# EAGLE board Clock (EAGLE 9.7.0)

Size 154.69 x 107.26 mm. Coordinates in mm from the lower left corner, seen from the top.
Outline: 0,0 154.69,0 154.69,107.26 0,107.26 0,0
Copper layers (1*16): Top 0.035mm / dielectric 1.5mm / Bottom 0.035mm
Design rules "default": minimum track width 6mil, minimum drill 0.35mm, track to track 6mil, track to pad 6mil, pad to pad 6mil, via to via 6mil, smd to smd 6mil, copper to edge 40mil, drill to drill 6mil, minimum pad ring 10mil, minimum via ring 8mil, stop-mask expansion 4mil, vias tented up to drill 0mil, thermal gap 10mil

## Footprints (pad centres in the part's own frame; a part is rotated, then mirrored left to right if it is on the bottom)
7SEG-13 = drill 0.813 long: 1 -5.08,-7.62; 2 -2.54,-7.62; 3 0,-7.62; 4 2.54,-7.62; 5 5.08,-7.62; 6 5.08,7.62; 7 2.54,7.62; 8 0,7.62; 9 -2.54,7.62; 10 -5.08,7.62
SWITCH-MOMENTARY-PTH-6.5MM = drill 1.016 pad 1.88: 1 -3.251,2.261; 2 3.251,2.261; 3 -3.251,-2.261; 4 3.251,-2.261
ARDUINO-UNO-R3-SHIELD = drill 1.016 pad 1.88: 3.3V 24.13,-2.54; 5V 24.13,0; A0 24.13,12.7; A1 24.13,15.24; A2 24.13,17.78; A3 24.13,20.32; A4 24.13,22.86; A5 24.13,25.4; AREF -24.13,-13.97; D2 -24.13,20.32; D3 -24.13,17.78; D4 -24.13,15.24; D5 -24.13,12.7; D6 -24.13,10.16; D7 -24.13,7.62; D8 -24.13,3.81; D9 -24.13,1.27; D10 -24.13,-1.27; D11 -24.13,-3.81; D12 -24.13,-6.35; D13 -24.13,-8.89; GND@0 24.13,2.54; GND@1 24.13,5.08; GND@2 -24.13,-11.43; IOREF 24.13,-7.62; NC 24.13,-10.16; RES 24.13,-5.08; RX -24.13,25.4; SCL -24.13,-19.05; SDA -24.13,-16.51; TX -24.13,22.86; VIN 24.13,7.62
DIP762W53P254L1969H508Q16B = drill 0.743 pad 1.343: 1 -3.81,8.89; 2 -3.81,6.35; 3 -3.81,3.81; 4 -3.81,1.27; 5 -3.81,-1.27; 6 -3.81,-3.81; 7 -3.81,-6.35; 8 -3.81,-8.89; 9 3.81,-8.89; 10 3.81,-6.35; 11 3.81,-3.81; 12 3.81,-1.27; 13 3.81,1.27; 14 3.81,3.81; 15 3.81,6.35; 16 3.81,8.89

## Placement (x,y rotation side)
DIGIT_H1_2  7SEG-CA  [7SEG-13]  21.97,93.17 0 top
DIGIT_H2_2  7SEG-CA  [7SEG-13]  9.27,93.17 0 top
DIGITM11  7SEG-CA  [7SEG-13]  52.45,93.17 0 top
DIGITM21  7SEG-CA  [7SEG-13]  39.75,93.17 0 top
DIGITS11  7SEG-CA  [7SEG-13]  82.93,93.17 0 top
DIGITS21  7SEG-CA  [7SEG-13]  70.23,93.17 0 top
SHOURS_INC  SWITCH_MOMENTARY  [SWITCH-MOMENTARY-PTH-6.5MM]  123.57,91.9 90 top
SMINUTES_INC  SWITCH_MOMENTARY  [SWITCH-MOMENTARY-PTH-6.5MM]  131.19,91.9 90 top
SPAUSE/PLAY  SWITCH_MOMENTARY  [SWITCH-MOMENTARY-PTH-6.5MM]  146.43,91.9 90 top
SSECONDS_INC  SWITCH_MOMENTARY  [SWITCH-MOMENTARY-PTH-6.5MM]  138.81,91.9 90 top
U1  ARDUINO-UNO-R3-SHIELD  [ARDUINO-UNO-R3-SHIELD]  87.29,29.84 270 top
UIC7447_  CD4511_PDIP  [DIP762W53P254L1969H508Q16B]  104.52,91.9 90 top

## Library data of the parts
DIGIT_H1_2 DIGIT_H2_2 DIGITM11 DIGITM21 DIGITS11 DIGITS21 = Tinkercad; CATEGORY: Opto-Electronic; SUB-CATEGORY: Display; TYPE: 7-Segment
SHOURS_INC SMINUTES_INC SPAUSE/PLAY SSECONDS_INC U1 UIC7447_ = Tinkercad

## Nets
DIGIT_H2_2_C: DIGIT_H1_2.4 DIGIT_H2_2.4 DIGITM11.4 DIGITM21.4 DIGITS21.4
U1_5V: U1.5V UIC7447_.16
U1_D2: SMINUTES_INC.1 SMINUTES_INC.2 U1.D2
U1_D3: SHOURS_INC.1 SHOURS_INC.2 U1.D3
U1_D4: U1.D4 UIC7447_.7
U1_D5: U1.D5 UIC7447_.1
U1_D6: U1.D6 UIC7447_.2
U1_D7: U1.D7 UIC7447_.6
U1_GND: SHOURS_INC.3 SHOURS_INC.4 SMINUTES_INC.3 SMINUTES_INC.4 SPAUSE/PLAY.3 SPAUSE/PLAY.4 SSECONDS_INC.3 SSECONDS_INC.4 U1.GND@0 U1.GND@1 U1.GND@2 UIC7447_.8
U1_RX: SPAUSE/PLAY.1 SPAUSE/PLAY.2 U1.RX
U1_TX: SSECONDS_INC.1 SSECONDS_INC.2 U1.TX
UIC7447__A: DIGIT_H1_2.7 DIGIT_H2_2.7 DIGITM11.7 DIGITM21.7 DIGITS11.7 DIGITS21.7 UIC7447_.13
UIC7447__B: DIGIT_H1_2.6 DIGIT_H2_2.6 DIGITM11.6 DIGITM21.6 DIGITS11.6 DIGITS21.6 UIC7447_.12
UIC7447__C: DIGITS11.4 DIGITS21.3 UIC7447_.11
UIC7447__D: DIGIT_H1_2.2 DIGIT_H2_2.2 DIGITM11.2 DIGITM21.2 DIGITS11.2 DIGITS21.2 UIC7447_.10
UIC7447__E: DIGIT_H1_2.1 DIGIT_H2_2.1 DIGITM11.1 DIGITM21.1 DIGITS11.1 DIGITS21.1 UIC7447_.9
UIC7447__F: DIGIT_H1_2.9 DIGIT_H2_2.9 DIGITM11.9 DIGITM21.9 DIGITS11.9 DIGITS21.9 UIC7447_.15
UIC7447__G: DIGIT_H1_2.10 DIGIT_H2_2.10 DIGITM11.10 DIGITM21.10 DIGITS11.10 DIGITS21.10 UIC7447_.14

## Tracks (layer width: path | path; a pad name or v marks a point on that pad's centre or on a via)
DIGIT_H2_2_C  (4 unrouted)
U1_5V  (1 unrouted)
U1_D2  (2 unrouted)
U1_D3  (2 unrouted)
U1_D4  (1 unrouted)
U1_D5  (1 unrouted)
U1_D6  (1 unrouted)
U1_D7  (1 unrouted)
U1_GND  (11 unrouted)
U1_RX  (2 unrouted)
U1_TX  (2 unrouted)
UIC7447__A  (6 unrouted)
UIC7447__B  (6 unrouted)
UIC7447__C  (2 unrouted)
UIC7447__D  (6 unrouted)
UIC7447__E  (6 unrouted)
UIC7447__F  (6 unrouted)
UIC7447__G  (6 unrouted)